# Altium PCB CH32V208W-NFC-R0-1v5.PcbDoc (part 1 of 2)
Units mil, origin at the board's own origin, x right, y up, seen from the top; angles counter-clockwise.
Board outline 2756.07 x 4438.27 mil, 2 copper layers (Top Layer, Bottom Layer); 80 components, 93 nets, 303 pads, 633 vias.
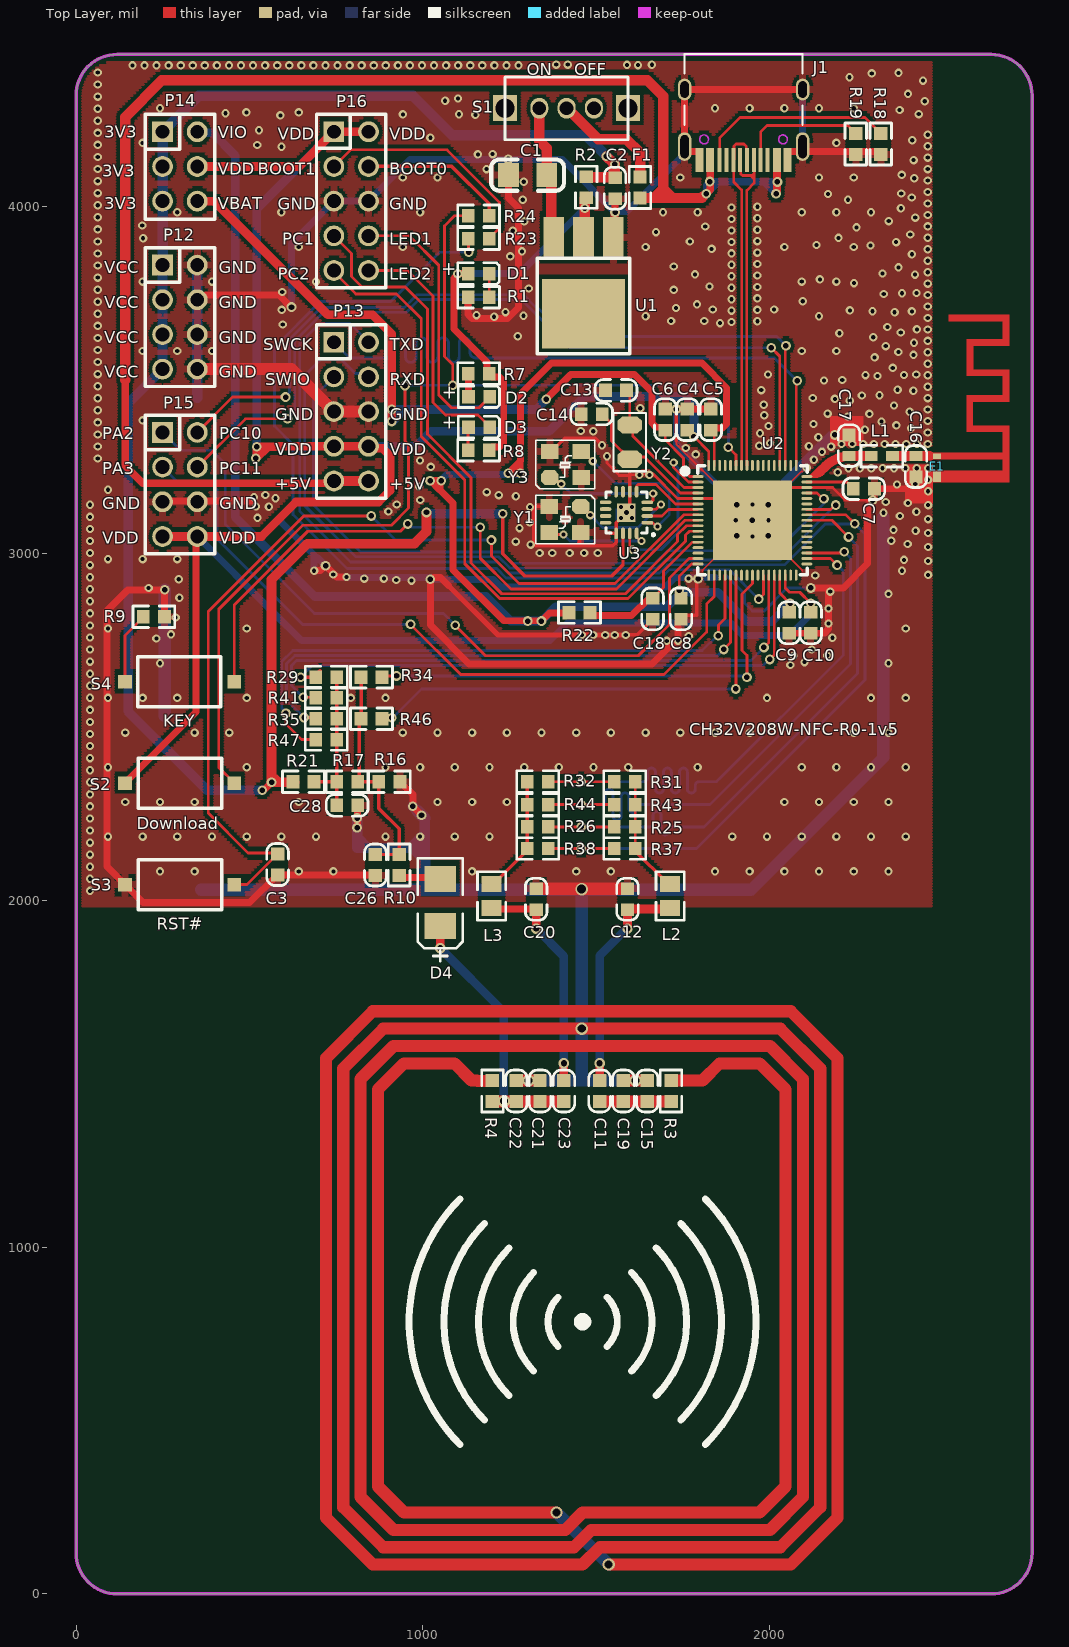
[diagram p0: Top Layer view]
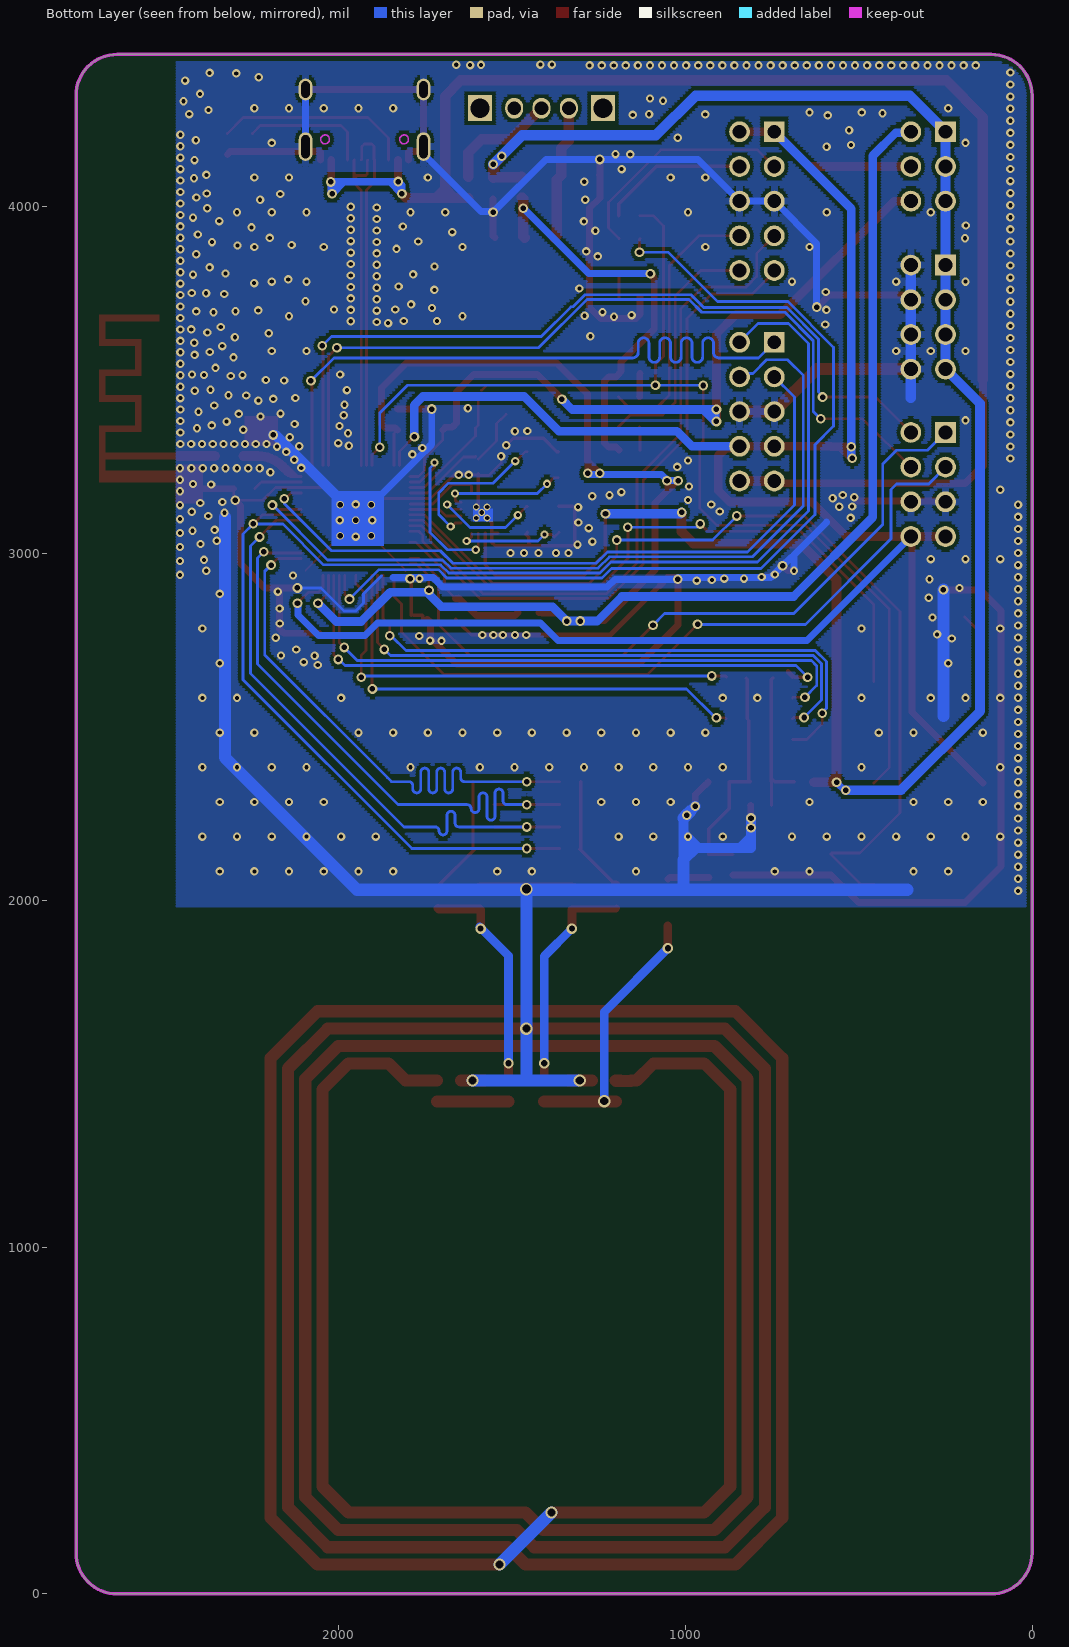
[diagram p1: Bottom Layer view, seen from below]

## Layer stack, top to bottom
Top Solder: solder mask 0.4, Solder Resist, Dk 3.5
Top Layer: signal copper 1.4
Dielectric 1: dielectric 12.6, FR-4, Dk 4.8
Bottom Layer: signal copper 1.4
Bottom Solder: solder mask 0.4, Solder Resist, Dk 3.5

## Board outline
0,118.11 0,4320.16 cw(c118.11,4320.16) 118.11,4438.27 2637.8,4438.27 cw(c2637.8,4320.16) 2755.91,4320.16 2755.91,118.11 2756.07,118.11 cw(c2637.96,118.11) 2637.96,0 118.27,0 cw(c118.27,118.11)

## Design rules (kind name [scope] priority, off if disabled: settings)
Clearance Clearance_2 [InNet('ANT')or InNet('NetC16_2') vs InPolygon] p1: gap=6 ignorepadtopadclearanceinfootprint=FALSE
Clearance Clearance_1 [InPolygon] p2: gap=10 ignorepadtopadclearanceinfootprint=FALSE
Clearance [All] p3: gap=6 ignorepadtopadclearanceinfootprint=FALSE except(8: Arc-Via Track-Via SMDPad-Via THPad-Via Via-Via Via-Fill Via-Poly Via-Region Via-Hole)
ComponentClearance [All] p1 off: gap=10 collisioncheckmode=3 verticalgap=10 showdistances=FALSE
DiffPairsRouting [All] p1: maxlimit=10 minlimit=7 mostfreqgap=8 toplayer_minwidth=6 toplayer_maxwidth=15 toplayer_prefwidth=8 bottomlayer_minwidth=6 bottomlayer_maxwidth=15 bottomlayer_prefwidth=8 maxuncoupledlength=500
MinimumSolderMaskSliver [All] p1 off: minsoldermaskwidth=10
PolygonConnect PolygonConnect_1 [IsVia] p1: connectstyle=Direct reliefconductorwidth=10 reliefentries=4 polygonreliefangle="90 Angle" airgapwidth=10
PolygonConnect [All] p2: connectstyle=Relief reliefconductorwidth=20 reliefentries=4 polygonreliefangle="90 Angle" airgapwidth=10
RoutingVias [All] p1: holewidth=16 width=28 viastyle="Through Hole" minholewidth=12 minwidth=24 maxholewidth=28 maxwidth=50
SilkToSilkClearance [All] p1 off: silktosilkclearance=10
SilkToSolderMaskClearance [IsPad] p1 off: minsilkscreentomaskgap=10 clearancetoexposedcopper=TRUE
SolderMaskExpansion [All] p1: expansion=2 istentingtop=FALSE
Width [All] p1: maxlimit=100 minlimit=5 preferedwidth=10
25 further rules are at their usual default settings.

## Classes and differential pairs
differential pair NewDifferentialPair1: +PB7 -PB6

## Components (designator, comment, footprint, x,y, rotation, side; value= is the part's Value field where it differs from the comment)
C1 "10uF" 3216_C 1356.88,4090.34 r0 top
C2 "2.2uF" 0603_C#1 1553.91,4082.75 r270 top
C3 "0.1uF" 0603_C#1 581.24,2072.39 r90 top
C4 "0.1uF" 0603_C#1 1762.47,3355.12 r90 top
C5 "0.1uF" 0603_C#1 1829.91,3415.75 r270 top
C6 "0.1uF" 0603_C#1 1698.84,3355.12 r90 top
C7 "1uF" 0603_C#1 2240.91,3186.12 r0 top
C8 "0.1uF" 0603_C#1 1743.91,2870.12 r270 top
C9 "0.1uF" 0603_C#1 2055.91,2830.12 r270 top
C10 "0.1uF" 0603_C#1 2117.91,2769.49 r90 top
C11 "30pF" 0603_C#1 1509.32,1480.3 r270 top
C12 "100pF" 0603_C#1 1589.84,2033.08 r270 top
C13 "12pF" 0603_C#1 1526.19,3469.79 r0 top
C14 "12pF" 0603_C#1 1456.01,3401.29 r0 top
C15 "NC" 0603_C#1 1646.65,1480.3 r270 top
C16 "1.8pF" 0603_C#2 2421.34,3219.66 r90 top
C17 "1.8pF" 0603_C#2 2228.41,3340.75 r270 top
C18 "0.1uF" 0603_C#1 1662.18,2870.12 r270 top
C19 "200pf" 0603_C#1 1577.99,1480.3 r270 top
C20 "100pF" 0603_C#1 1326.51,1972.45 r90 top
C21 "NC" 0603_C#1 1337.65,1419.67 r90 top
C22 "200pf" 0603_C#1 1268.99,1419.67 r90 top
C23 "30pF" 0603_C#1 1406.32,1480.3 r270 top
C26 "110pF" 0603_C#1 862.83,2071.02 r90 top
C28 "470p" 0603_C#1 811.82,2273.35 r180 top
D1 "power(RED)" 0603+ 1130.28,3806.12 r0 top
D2 "BLUE" 0603+ 1131.65,3451.46 r0 top
D3 "YELLOW" 0603+ 1131.65,3363.79 r0 top
D4 "Diode BAS70WS" 3528+ 1049.91,1926.12 r90 top
E1 "ANTENNA" ANT-F-1-2.4G-1.6mmFR4 2481.91,3280.02 r270 top
F1 "500mA" 0603#1 1625.91,4024.12 r90 top
J1 "TYPE-C-Receptacle-2.0" TYPE-C-Receptacle-2.0 1924.38,4134.12 r180 top
L1 "1.8nH" 0603#2 2292.78,3280.12 r0 top
L2 "1uH" 0805 1712.82,2047.06 r270 top
L3 "1uH" 0805 1197.82,2047.06 r270 top
P12 "Header 4X2" IDC8-2.54mm 249.55,3830.82 r0 top
P13 "LINK" IDC10-2.54mm 743.16,3208.48 r0 top
P14 "Psel" IDC6-2.54mm 249.55,4215.15 r270 top
P15 "HEADER 4x2" IDC8-2.54mm 249.55,3348.48 r0 top
P16 "HEADER 5x2" IDC10-2.54mm 743.16,3815.15 r0 top
R1 "1K" 0603#1 1130.28,3738.12 r0 top
R2 "0Ω" 0603#1 1470.91,4085.75 r270 top
R3 "4.7Ω(5.1Ω)" 0603#1 1715.32,1419.67 r90 top
R4 "4.7Ω(5.1Ω)" 0603#1 1200.32,1419.67 r90 top
R7 "1K" 0603#1 1190.91,3518.12 r180 top
R8 "1K" 0603#1 1190.91,3297.12 r180 top
R9 "10K" 0603#1 254.77,2817.08 r180 top
R10 "2kΩ" 0603#1 931.43,2071.02 r90 top
R16 "18K" 0603#1 933.62,2341.44 r180 top
R17 "20K" 0603#1 751.19,2341.44 r0 top
R18 "NC(5.1K)" 0603#1 2319.91,4210.12 r270 top
R19 "NC(5.1K)" 0603#1 2247.91,4210.12 r270 top
R21 "5100K" 0603#1 625.52,2341.44 r0 top
R22 "0Ω" 0603#1 1421.09,2829.06 r0 top
R23 "10K" 0603#1 1130.28,3907.03 r0 top
R24 "10K" 0603#1 1190.91,3973.03 r180 top
R25 "0Ω(NC)" 0603#1 1551.28,2211.24 r0 top
R26 "NC(0Ω)" 0603#1 1300.91,2211.24 r0 top
R29 "NC(110K)" 0603#1 751.34,2643.02 r180 top
R31 "NC(0Ω)" 0603#1 1551.28,2341.66 r0 top
R32 "0Ω(NC)" 0603#1 1300.91,2341.66 r0 top
R34 "20K(NC)" 0603#1 821.34,2643.02 r0 top
R35 "110K(NC)" 0603#1 751.34,2523.02 r180 top
R37 "NC(0Ω)" 0603#1 1551.28,2149.03 r0 top
R38 "NC(0Ω)" 0603#1 1300.91,2149.03 r0 top
R41 "NC(110K)" 0603#1 751.34,2583.02 r180 top
R43 "NC(0Ω)" 0603#1 1551.28,2275.45 r0 top
R44 "NC(0Ω)" 0603#1 1300.91,2275.45 r0 top
R46 "NC(20K)" 0603#1 821.65,2523.02 r0 top
R47 "NC(110K)" 0603#1 751.34,2463.02 r180 top
S1 "SW SPDT" SW1 1414.17,4283.12 r0 top
S2 "Download" SMD_6.1x3.65x2.5mm-KEY 141.31,2337.49 r0 top
S3 "RST#" SMD_6.1x3.65x2.5mm-KEY 141.31,2044.86 r0 top
S4 "KEY" SMD_6.1x3.65x2.5mm-KEY 456.27,2630.12 r180 top
U1 "1117-3.3V" SOT-223 1548.91,3910.12 r180 top
U2 "CH32V208W" QFN68_8x8 1949.92,3095.14 r270 top
U3 "CH445P" QFN16_3X3 1586.58,3117.42 r90 top
Y1 "32MHz" XT3225 1454.65,3135.19 r180 top
Y2 "32768Hz" FC-135 1596.33,3370.02 r270 top
Y3 "27.12MHz" XT3225 1365.79,3218.09 r0 top

## Footprints (in the part's own frame and the unit in brackets; to place one, negate y for a bottom-side part, rotate by r counter-clockwise, add the part's x,y. Pads: shape width x height; smd on the part's side, far side on the other; paste and mask are expansions set on the pad)
0603#1 [mm]
  rect 0.93x0.98 smd: 1(0,0) 2(1.54,0)
  silkscreen extent -0.76,-0.79 2.3,0.79
0603#2 [mm]
  rect 0.93x0.714 smd: 1(0,0) 2(1.54,0)
  silkscreen extent -0.76,-0.79 2.3,0.79
0603+ [mm]
  rect 0.93x0.98 smd: 1(0,0) 2(1.54,0)
  silkscreen extent -0.76,-0.79 2.27,0.79
0603_C#1 [mm]
  rect 0.93x0.98 smd mask+0.051: 1(0,0) 2(1.54,0)
  silkscreen extent -0.76,-0.79 2.31,0.79
0603_C#2 [mm]
  rect 0.93x0.98 smd mask+0.051: 1(0,0)
  rect 0.714x0.98 smd mask+0.051: 2(1.54,0)
  silkscreen extent -0.76,-0.79 2.31,0.79
0805 [mm]
  rect 1.16x1.47 smd: 1(0,0) 2(1.78,0)
  silkscreen extent -0.88,-1.04 2.66,1.03
3216_C [mil]
  rect 60x70 smd: 1(0,0) 2(-110,0)
  silkscreen extent -160,-45 50,45
3528+ [mil]
  rect 75x90 smd: 1(0,0) 2(135,0)
  silkscreen extent -102,-65 195,65
ANT-F-1-2.4G-1.6mmFR4 [mm]
  rect 0.8x0.6 smd mask+0: 0(1.483,0)
  rect 0.4x0.6 smd mask+0: 1(0,0)
  Top Layer region: 0.24,5.027 -0.26,5.027 -0.26,-0.304 0.24,-0.304
  Top Layer region: 1.94,5.002 1.04,5.002 1.04,-0.304 1.94,-0.304
  Top Layer region: 1.94,5.296 -2.26,5.296 -2.26,4.796 1.94,4.796
  Top Layer region: -1.758,4.977 -2.258,4.977 -2.258,2.157 -1.758,2.157
  Top Layer region: -1.85,2.651 -4.39,2.651 -4.39,2.156 -1.85,2.156
  Top Layer region: -3.96,4.976 -4.46,4.976 -4.46,2.156 -3.96,2.156
  Top Layer region: -3.96,5.296 -6.36,5.296 -6.36,4.796 -3.96,4.796
  Top Layer region: -5.86,4.978 -6.36,4.978 -6.36,2.158 -5.86,2.158
  Top Layer region: -5.873,2.657 -8.363,2.657 -8.363,2.157 -5.873,2.157
  Top Layer region: -8.06,4.978 -8.56,4.978 -8.56,2.158 -8.06,2.158
  Top Layer region: -8.06,5.296 -10.36,5.296 -10.36,4.796 -8.06,4.796
  Top Layer region: -9.86,4.976 -10.36,4.976 -10.36,0.856 -9.86,0.856
FC-135 [mil]
  oct 50x70 smd: 1(0,0) 2(98.43,0)
  silkscreen extent -35,-47 133,47
IDC6-2.54mm [mil]
  rect 60x60 hole 40: 1(0,0)
  round 60 hole 40: 2(0,100) 3(100,0) 4(100,100) 5(200,0) 6(200,100)
  silkscreen extent -50,-50 252,150
IDC8-2.54mm [mil]
  rect 60x60 hole 40: 1(0,0)
  round 60 hole 40: 2(100,0) 3(0,-100) 4(100,-100) 5(0,-200) 6(100,-200) 7(0,-300) 8(100,-300)
  silkscreen extent -50,-350 150,50
IDC10-2.54mm [mil]
  rect 60x60 hole 40: 1(0,400)
  round 60 hole 40: 2(100,400) 3(0,300) 4(100,300) 5(0,200) 6(100,200) 7(0,100) 8(100,100) 9(0,0) 10(100,0)
  silkscreen extent -50,-50 150,450
QFN16_3X3 [mm]
  rect 1.35x1.35 smd mask+0.051: 0(0,0)
  round 0.508 hole 0.356: 0(0,0)
  oval 0.28x0.85 smd mask+0.051: 1(-0.75,-1.526) 2(-0.25,-1.526) 3(0.25,-1.526) 4(0.75,-1.526) 9(0.75,1.526) 10(0.25,1.526) 11(-0.25,1.526) 12(-0.75,1.526)
  oval 0.85x0.28 smd mask+0.051: 5(1.526,-0.75) 6(1.526,-0.25) 7(1.526,0.25) 8(1.526,0.75) 13(-1.526,0.75) 14(-1.526,0.25) 15(-1.526,-0.25) 16(-1.526,-0.75)
  silkscreen extent -1.7,-2.05 1.5,1.5, body extent -1.52,-1.52 1.52,1.52, height 0.25
QFN68_8x8 [mm]
  round 0.559 hole 0.406: 0(-1.143,1.143) 0(-1.143,-1.143) 0(0,0) 0(1.143,1.143) 0(1.143,-1.143)
  rect 5.8x5.8 smd mask+0.051: 0(0,0)
  oval 0.2x0.8 smd mask+0.051: 1(-3.2,-3.982) 2(-2.8,-3.982) 3(-2.4,-3.982) 4(-2,-3.982) 5(-1.6,-3.982) 6(-1.2,-3.982) 7(-0.8,-3.982) 8(-0.4,-3.982) 9(0,-3.982) 10(0.4,-3.982) 11(0.8,-3.982) 12(1.2,-3.982) 13(1.6,-3.982) 14(2,-3.982) 15(2.4,-3.982) 16(2.8,-3.982) 17(3.2,-3.982) 35(3.2,3.982) 36(2.8,3.982) 37(2.4,3.982) 38(2,3.982) 39(1.6,3.982) 40(1.2,3.982) 41(0.8,3.982) 42(0.4,3.982) 43(0,3.982) 44(-0.4,3.982) 45(-0.8,3.982) 46(-1.2,3.982) 47(-1.6,3.982) 48(-2,3.982) 49(-2.4,3.982) 50(-2.8,3.982) 51(-3.2,3.982)
  oval 0.8x0.2 smd mask+0.051: 18(4.018,-3.2) 19(4.018,-2.8) 20(4.018,-2.4) 21(4.018,-2) 22(4.018,-1.6) 23(4.018,-1.2) 24(4.018,-0.8) 25(4.018,-0.4) 26(4.018,0) 27(4.018,0.4) 28(4.018,0.8) 29(4.018,1.2) 30(4.018,1.6) 31(4.018,2) 32(4.018,2.4) 33(4.018,2.8) 34(4.018,3.2) 52(-4.018,3.2) 53(-4.018,2.8) 54(-4.018,2.4) 55(-4.018,2) 56(-4.018,1.6) 57(-4.018,1.2) 58(-4.018,0.8) 59(-4.018,0.4) 60(-4.018,0) 61(-4.018,-0.4) 62(-4.018,-0.8) 63(-4.018,-1.2) 64(-4.018,-1.6) 65(-4.018,-2) 66(-4.018,-2.4) 67(-4.018,-2.8) 68(-4.018,-3.2)
  silkscreen extent -4,-5.13 4,4
SMD_6.1x3.65x2.5mm-KEY [mm]
  rect 1x1 smd: 1(0,0) 2(8,0)
  silkscreen extent 0.98,-1.83 7.08,1.83
SOT-223 [mil]
  rect 60x120 smd: 1(0,0) 2(86,0) 3(172,0)
  rect 240x200 smd: ""(86,220)
  silkscreen extent -47,60 219,335
SW1 [mm]
  rect 1.75x1.9 hole 1.4: 0(-4.5,0) 0(4.5,0)
  oval 1.321x1.524 hole 1.016: 1(0,0) 2(-2,0) 3(2,0)
  silkscreen extent -4.51,-2.31 4.5,2.29
TYPE-C-Receptacle-2.0 [mm]
  oval 1x2.1 hole 0.6 slot 1.7 at 90 deg: 0(-4.32,-0.97) 0(4.32,-0.97)
  oval 1x1.6 hole 0.6 slot 1.2 at 90 deg: 0(-4.32,-5.15) 0(4.32,-5.15)
  rect 0.6x1.75 smd mask+0.051: A1(-3.225,0) A4(-2.45,0) B1(3.225,0) B4(2.45,0)
  rect 0.3x1.75 smd mask+0.051: A5(-1.25,0) A6(-0.25,0) A7(0.25,0) A8(1.25,0) B5(1.75,0) B6(0.75,0) B7(-0.75,0) B8(-1.75,0)
  Keep-Out Layer circle w0.1: c2.89,-1.5 r0.325
  Keep-Out Layer circle w0.1: c-2.89,-1.5 r0.325
  silkscreen extent -4.32,-7.75 4.32,-2.55
XT3225 [mm]
  oct 1.3x1.1 smd: 1(0,0)
  rect 1.3x1.1 smd: 2(2.3,0) 3(2.3,1.9) 4(0,1.9)
  silkscreen extent -1.02,-0.8 3.27,2.74

## Part data
C1 C2 C3 C4 C5 C6 C7 C8 C9 C10 C11 C12 C13 C14 C15 C16 C17 C18 C19 C20 C21 C22 C23 C26 C28: library part CAP, "Capacitor"
D1 D2 D3: library part LED0, "Typical INFRARED GaAs LED", LatestRevisionDate=08-Jul-2005, LatestRevisionNote="Mech Layer 1 removed.", PackageDescription="LED; 2 Leads", PackageReference=LED-0, Published=8-Jun-2000, Publisher="Altium Limited"
D4: library part "Diode BAS70", "Silicon AF Schottky Diode for High-Speed Switching", ComponentLink1Description="Manufacturer Link", ComponentLink1URL=http://www.infineon.com/, ComponentLink2Description=Datasheet, ComponentLink2URL=http://www.infineon.com/upload/Document/cmc_upload/documents/009/382/bas40_bas140series_1.pdf
E1: "Generic Antenna"
F1: library part FUSE1, "Fuse"
J1: "Type-C USB2.0 母座"
L1 L2 L3: library part INDUCTOR
P12: "Header, 4-Pin, Dual row", LatestRevisionDate=17-Jul-2002, LatestRevisionNote="Re-released for DXP Platform.", Publisher="Altium Limited"
P13: library part "Header 5X2H", "Header, 5-Pin, Dual row, Right Angle", LatestRevisionDate=17-Jul-2002, LatestRevisionNote="Re-released for DXP Platform.", Publisher="Altium Limited"
P14: library part "Header 3X2H", "Header, 3-Pin, Dual row, Right Angle", LatestRevisionDate=17-Jul-2002, LatestRevisionNote="Re-released for DXP Platform.", Publisher="Altium Limited"
P15: library part "Header 4X2", "Header, 4-Pin, Dual row", LatestRevisionDate=17-Jul-2002, LatestRevisionNote="Re-released for DXP Platform.", Publisher="Altium Limited"
P16: "Header, 5-Pin, Dual row"
R1 R2 R3 R4 R7 R8 R9 R10 R16 R17 R18 R19 R21 R25 R26 R29 R31 R32 R34 R35 R37 R38 R41 R43 R44 R46 R47: library part RES
R22: library part R
R23 R24: library part Res2, "Resistor"
S2 S3 S4: library part KEY1
U2: "RISC-V BLE5.3 MCU, 10M Ethernet, 2*USB, CAN"
U3: "QPDT Low resistance mux 2:1 Analog switches with enable for 3.3V"
Y1 Y2 Y3: library part XTAL, "Crystal Oscillator", LatestRevisionDate=17-Jul-2002, LatestRevisionNote="Re-released for DXP Platform.", PackageDescription="Crystal, Thru-Hole; 2 Leads; Body 3.1 x 8.2 mm (Dia.xH)", PackageReference=R38, Published=8-Jun-2000, Publisher="Altium Limited"

## Via types
v1: diameter 24, hole 12, Top Layer to Bottom Layer, tented both sides, 537 vias
v2: diameter 28, hole 16, Top Layer to Bottom Layer, tented both sides, 80 vias
v3: diameter 35.43, hole 23.62, Top Layer to Bottom Layer, tented both sides, 6 vias
v4: diameter 30, hole 18, Top Layer to Bottom Layer, tented both sides, 5 vias
v5: diameter 20, hole 12, Top Layer to Bottom Layer, tented both sides, 4 vias
v6: diameter 36, hole 26, Top Layer to Bottom Layer, tented both sides, 1 vias

## Nets (pads, with @x,y where several pads share a name; then routed paths per layer and width w, separated by ;. In a path a pad name is that pad's centre, name@x,y a point inside that pad or via, vN(x,y) a via of type N, cw(c..) or ccw(c..) an arc to the next point about the centre after c; other vN are vias at no path point)
3V3: C2.1 P12.1 P12.3 P12.5 P12.7 P14.1 P14.3 P14.5 R2.1 R21.1 U3.14 | length 5944.2
  Top Layer w10: v2(1229.8,3114.34) 1229.8,2998.31 1293.52,2934.58 1544.61,2934.58 1576.74,2966.71 U3.14@1576.74,3057.33
  Top Layer w20: v2(536.96,2316.71) 540.47,2316.71 v2(563.55,2339.8)
  Top Layer w28.1: R21.1@629.78,2339.8 582.39,2339.8 ; v2(1010.33,3117.68) 1010.33,3062.23 975.72,3027.62 667.06,3027.62 563.55,2924.12 563.55,2372.88 563.55,2358.63 ; 563.55,2358.63 572.97,2349.21 582.39,2339.8 ; 563.55,2358.63 v2(563.55,2339.8) 582.39,2339.8
  Top Layer w30: R2.1@1470.91,4085.75 1472.41,4084.25 C2.1@1551.42,4084.25 ; v2(1529.07,4144.37) 1549.61,4123.82 1549.61,4086.06 C2.1@1551.42,4084.25 ; v2(1553.31,4121.34) C2.1@1553.31,4083.35 ; C2.1@1551.42,4084.25 1552.92,4082.75 C2.1@1553.91,4082.75 C2.1@1553.31,4083.35 ; C2.1@1551.42,4084.25 1552.41,4084.25 C2.1@1553.31,4083.35
  Bottom Layer w20: 249.45,3912.51 249.55,3912.62 ; v2(536.96,2316.71) 536.96,2313.2 v2(563.55,2339.8)
  Bottom Layer w28.1: P12.1@249.55,3830.82 P12.3@249.55,3730.82 P12.5@249.55,3630.82 P12.7@249.55,3530.82 150.27,3431.53 150.27,2544.41 377.57,2317.11 536.56,2317.11 v2(536.96,2316.71) ; v2(1010.33,3117.68) 1013.68,3114.34 v2(1229.8,3114.34)
  Bottom Layer w30: P12.1@249.55,3830.82 249.55,3912.62 P14.5@249.55,4015.15 P14.3@249.55,4115.15 P14.1@249.55,4215.15 353.18,4318.77 970.08,4318.77 1084.29,4204.56 1470.09,4204.56 v2(1553.31,4121.34)
3V3S: D1.1 R2.2 R7.1 R8.1 U1.2 | length 1210.2
  Top Layer w20: D1.1@1130.28,3806.12 v2(1100.16,3806.12) 1100.16,3803.96 1089.16,3792.96 1089.16,3647.1 1184.51,3551.75 1184.51,3524.52 R7.1@1190.91,3518.12 1190.91,3517.14 1199.21,3508.83 1221.28,3508.83 1232.99,3497.11 1232.99,3318.13 1221.28,3306.41 1199.21,3306.41 1190.91,3298.11 R8.1@1190.91,3297.12
  Top Layer w30: U1.2@1462.91,3910.12 1466.91,3914.12 v2(1466.91,3995) 1466.91,4021.82 1470.21,4025.12 R2.2@1470.91,4025.12
  Bottom Layer w20: v2(1100.16,3806.12) 1278.02,3806.12 v2(1466.91,3995)
+5V: F1.1 J1.A4 J1.B4 P13.9 P13.10 | length 4563.2
  Top Layer w22: 141.65,3500.65 141.65,3252.43 192.6,3201.48 736.16,3201.48 P13.9@743.16,3208.48 ; 1715.45,4027.43 1806.71,4027.43 1827.92,4048.64 J1.B4@1827.92,4134.12 ; v2(2018.02,4036.52) 2018.02,4038.14 2020.84,4040.96 v2@2020.84,4071.56 ; J1.A4@2020.84,4134.12 v2@2020.84,4071.56 ; v2(2021.85,4070.55) v2@2020.84,4071.56
  Top Layer w30: 141.65,3500.65 141.65,4257.67 247.08,4363.09 1647.22,4363.09 1692.29,4318.02 1692.29,4050.59 ; P13.9@743.16,3208.48 P13.10@843.16,3208.48 ; F1.1@1625.91,4024.12 1665.83,4024.12 ; 1692.29,4027.43 1692.29,4050.59 ; v2@1806.71,4027.43 1803.41,4024.12 1718.76,4024.12 ; 1665.83,4024.12 1718.76,4024.12 ; 1665.83,4024.12 1692.29,4050.59 ; 1692.29,4050.59 1715.45,4027.43 1718.76,4024.12
  Bottom Layer w22: v2(1816.64,4036.52) v2@1817.79,4037.66 ; v2@1817.79,4037.66 1850.68,4070.55 ; v2@1817.79,4037.66 1817.79,4060.66 1827.22,4070.09 v2(1827.22,4071.71) 1828.38,4070.55 1850.68,4070.55 ; 1850.68,4070.55 1983.99,4070.55 ; 1983.99,4070.55 v2(2021.85,4070.55) 2020.7,4069.4 2020.7,4040.82 2018.02,4038.14 v2(2018.02,4036.52) 1983.99,4070.55
ANT: C17.2 L1.1 U2.51 | length 298.8
  Top Layer w8: 2139.78,3244.2 2123.78,3228.19 cw(c2106.7,3245.27) U2.51@2106.7,3221.12 ; 2140.91,3231.12 cw(c2116.77,3255.26) U2.51@2116.77,3221.12 ; 2141.87,3236.23 2140.95,3235.31 cw(c2106.7,3269.55) U2.51@2106.7,3221.12 ; 2153.93,3229.98 cw(c2132.55,3251.35) 2132.55,3221.12 U2.51@2116.77,3221.12 ; U2.51@2106.7,3221.12 U2.51@2116.77,3221.12
  Top Layer w28.1: 2146.47,3236.69 2160.62,3250.83 cw(c2231.33,3180.12) 2231.33,3280.12 2274.28,3280.12
BOOT0: R24.2 S2.2 U2.63 | length 3220.3
  Top Layer w8: S2.2@456.27,2337.49 411.47,2382.29 411.47,2838.8 653.27,3080.6 908.63,3080.6 958.29,3130.26 958.29,3313.57 948.29,3323.57 v2(948.29,3483.7) ; v2(1085.91,3484.12) 1085.91,3544.03 1062.29,3567.64 1062.29,3943.97 1091.35,3973.03 R24.2@1130.28,3973.03 ; v2(1880.53,3306) 1902.68,3283.86 U2.63@1902.68,3253.32
  Bottom Layer w8: v2@948.29,3484.12 v2(1085.91,3484.12) 1801.11,3484.12 1880.53,3404.7 v2(1880.53,3306)
BOOT1: R23.1 U2.28 | length 2754
  Top Layer w8: R23.1@1130.28,3907.03 1131.71,3905.59 v2(1131.71,3868.11) ; v2(1967.76,2868.11) 1981.42,2881.77 U2.28@1981.42,2936.96
  Bottom Layer w8: v2(1131.71,3868.11) 1049.62,3868.11 907.13,3725.61 704.09,3725.61 572.28,3593.8 572.28,3366.47 625.72,3313.03 625.72,3111.4 781.09,2956.03 1212.69,2956.03 1239.55,2929.17 1687.25,2929.17 1710.89,2952.81 1883.05,2952.81 v2(1967.76,2868.11)
CC1: J1.A5 R19.1 | length 372.6
  Top Layer w8: J1.A5@1973.59,4134.12 1973.59,4214.79 1991.88,4233.08 2224.95,4233.08 2232.61,4225.41 2232.61,4224.43 2246.92,4210.12 R19.1@2247.91,4210.12
CC2: J1.B5 R18.1 | length 570.6
  Top Layer w8: J1.B5@1855.48,4134.12 1855.48,4196.84 1914.58,4255.94 2274.09,4255.94 R18.1@2319.91,4210.12